# EAGLE board CCM_0009 (EAGLE 8.3.1)
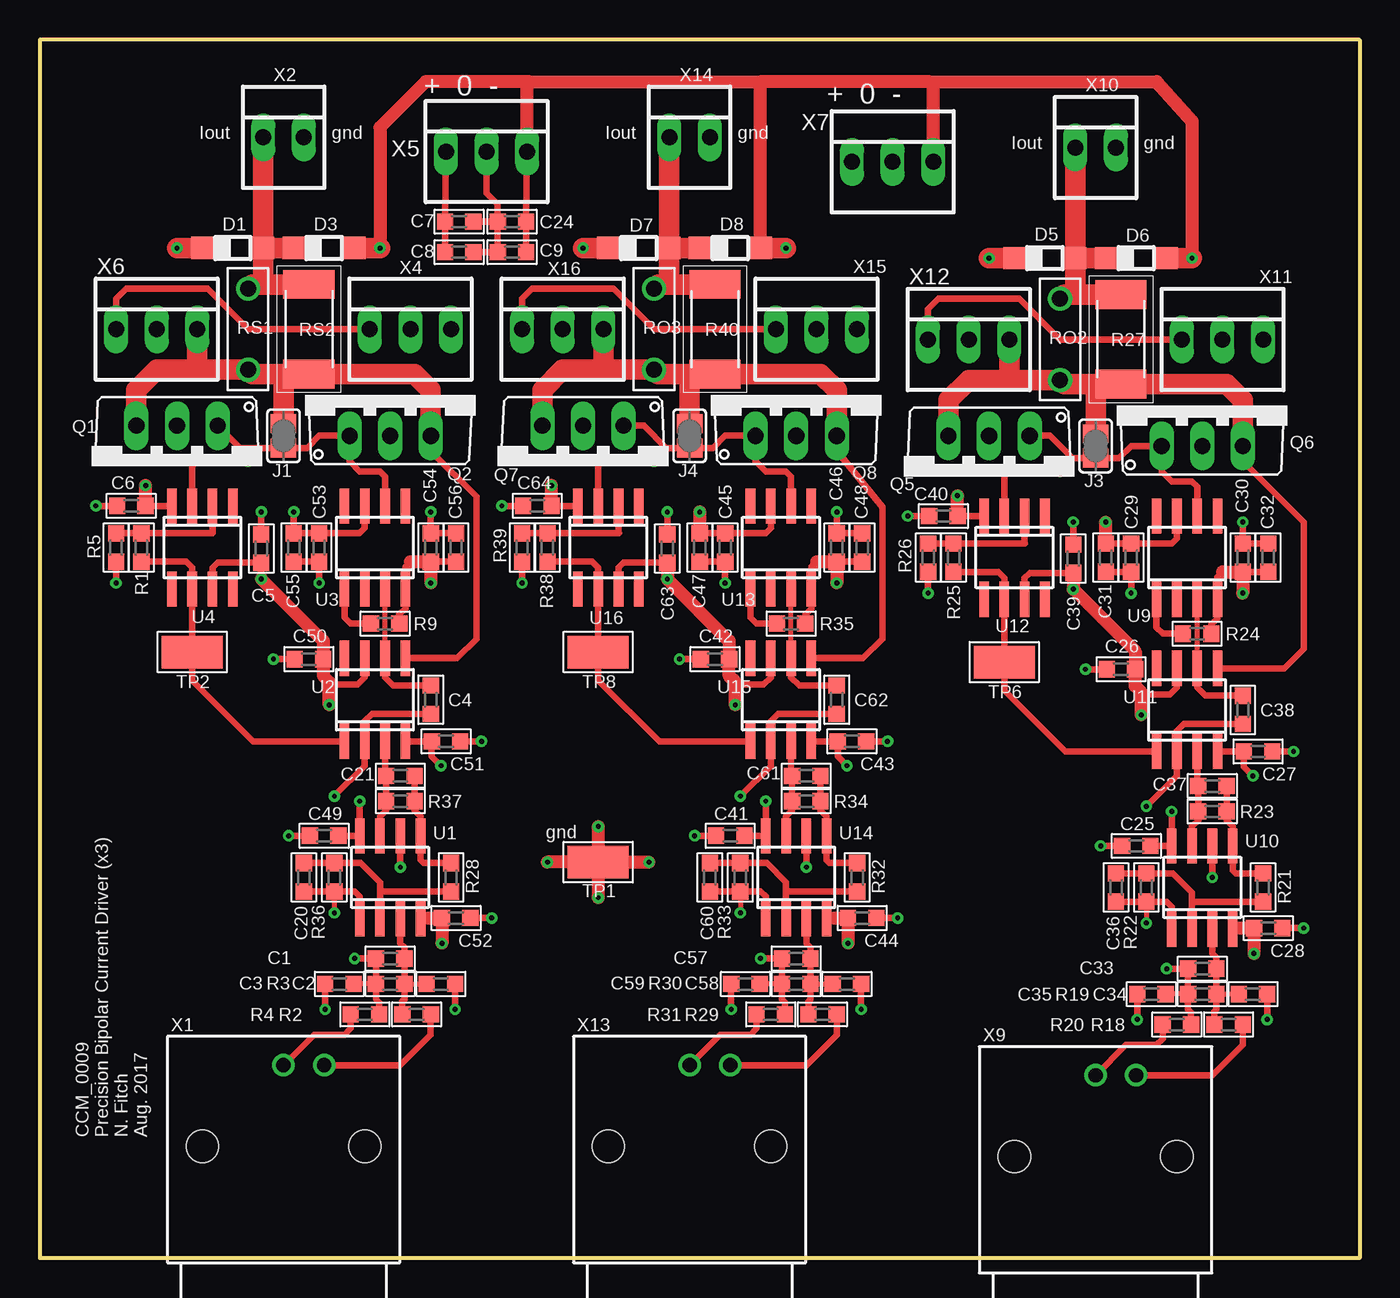
[diagram p0: board, top side]
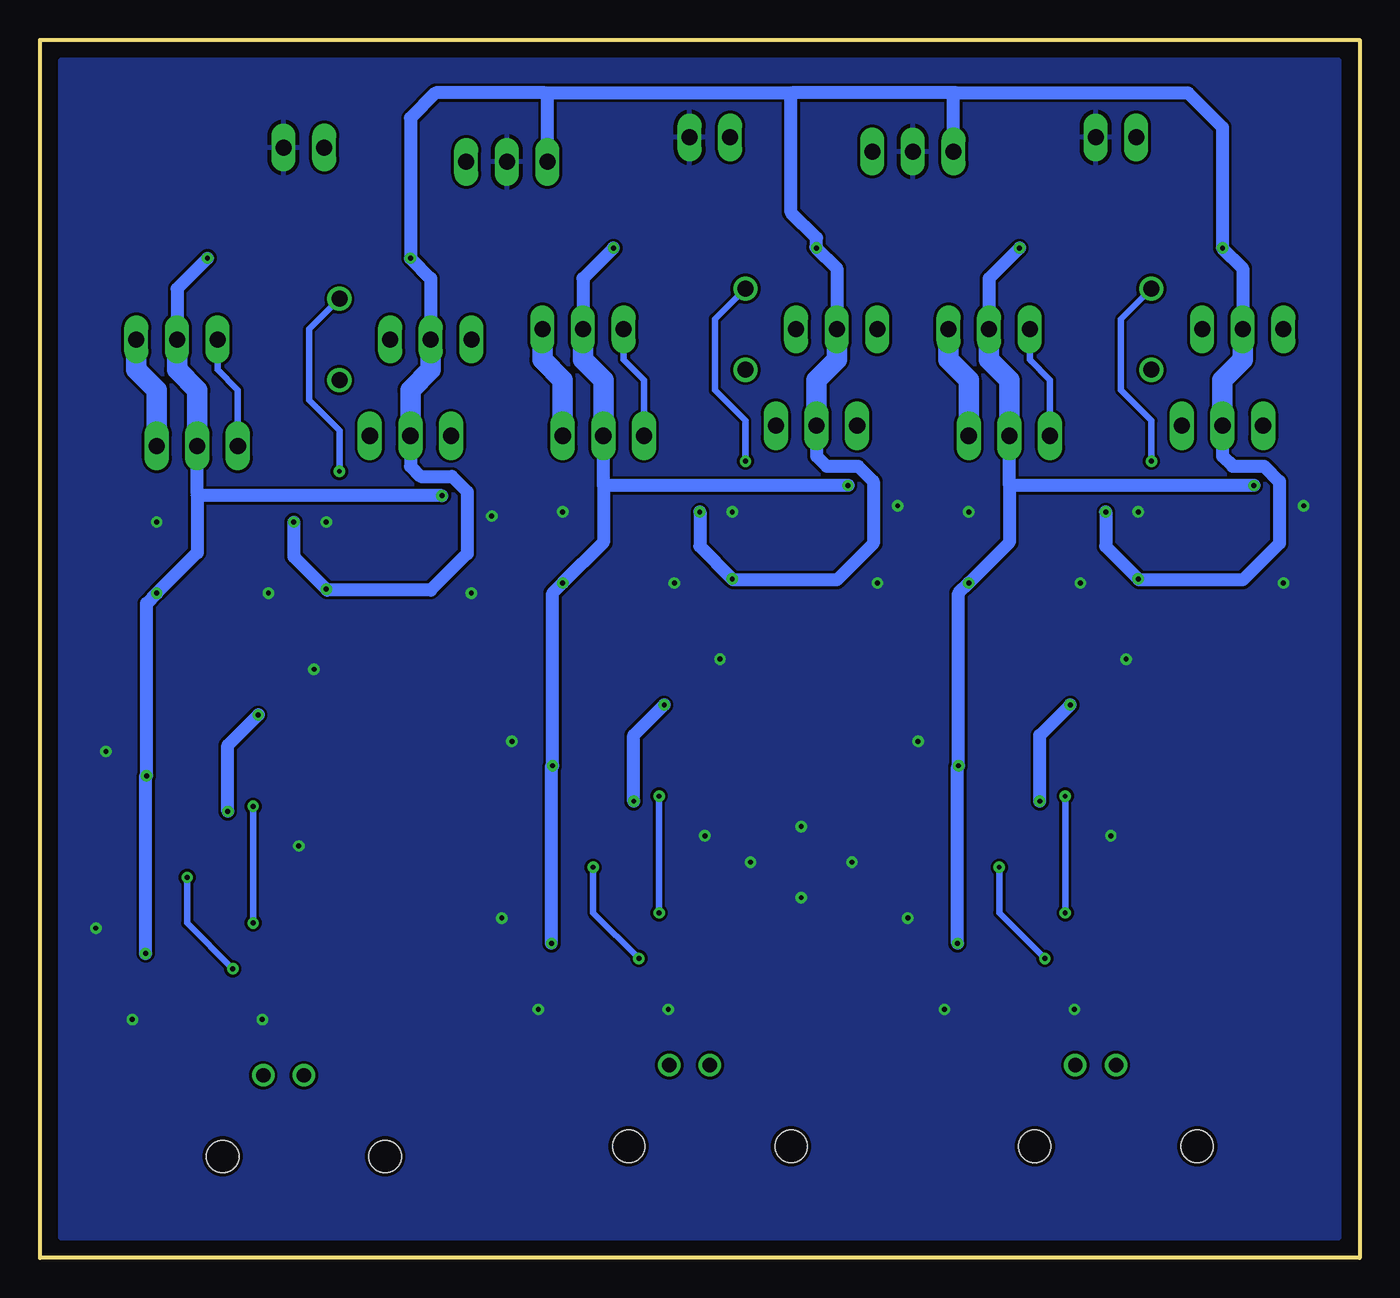
[diagram p1: board, bottom side, seen from below]

Size 82.55 x 76.2 mm. Coordinates in mm from the lower left corner, seen from the top.
Outline: 0,0 82.55,0 82.55,76.2 0,76.2 0,0
Copper layers (1*16): Top 0.035mm / dielectric 1.5mm / Bottom 0.035mm
Design rules "default *": minimum track width 10mil, minimum drill 10mil, track to track 7mil, track to pad 7mil, pad to pad 7mil, via to via 7mil, smd to smd 7mil, copper to edge 10mil, drill to drill 8mil, minimum pad ring 10mil, minimum via ring 8mil, stop-mask expansion 4mil, vias tented up to drill 0mil, thermal gap 10mil
Net classes: 1 standard: width 0.61 mm, clearance 0.254 mm

## Footprints (pad centres in the part's own frame; a part is rotated, then mirrored left to right if it is on the bottom)
0603 = smd 1.016 x 1.016: 1 -0.889,0; 2 0.889,0
SOD123 = smd 1.4 x 1.4: A 1.9,0; C -1.9,0
SJ = smd 1.168 x 1.6: 1 -0.762,0; 2 0.762,0
TO220AV = drill 1.016 long: B -2.54,-2.54; C 0,-2.54; E 2.54,-2.54
2512 = smd 1.8 x 3.2: 1 -2.8,0; 2 2.8,0
LTO30 = drill 1: P$1 0,0; P$2 5.08,0
TESTPOINT = smd 3.81 x 2.032: P$1 0,0
SO8 = smd 0.6 x 2.2: 1 -1.905,-2.6; 2 -0.635,-2.6; 3 0.635,-2.6; 4 1.905,-2.6; 5 1.905,2.6; 6 0.635,2.6; 7 -0.635,2.6; 8 -1.905,2.6
AMP_227161 = drill 0.9 pad 1.27: 1 0,-5.08; 2 -2.54,-5.08 | hole 2: -5.08,0; 5.08,0
22-23-2021 = drill 1 long: 1 -1.27,0; 2 1.27,0
22-23-2031 = drill 1 long: 1 -2.54,0; 2 0,0; 3 2.54,0

## Placement (x,y rotation side)
C1  10nF  [0603]  21.91,18.73 180 top
C2  1nF  [0603]  25.08,17.14 180 top
C3  1nF  [0603]  18.73,17.14 180 top
C4  DNI  [0603]  24.45,34.92 90 top
C5  0.1u  [0603]  13.84,44.39 90 top
C6  0.1u  [0603]  5.71,47.05 0 top
C7  4.7u  [0603]  26.23,64.83 0 top
C8  0.1u  [0603]  26.23,62.93 0 top
C9  4.7u  [0603]  29.53,62.93 0 top
C20  47pF  [0603]  16.51,23.81 270 top
C21  47pF  [0603]  22.54,30.16 180 top
C24  0.1u  [0603]  29.53,64.83 0 top
C25  0.1u  [0603]  68.58,25.78 180 top
C26  0.1u  [0603]  67.63,36.83 180 top
C27  0.1u  [0603]  76.2,31.69 180 top
C28  0.1u  [0603]  76.83,20.64 180 top
C29  0.1u  [0603]  68.26,43.81 270 top
C30  0.1u  [0603]  75.25,43.81 270 top
C31  4.7u  [0603]  66.67,43.81 270 top
C32  4.7u  [0603]  76.83,43.81 270 top
C33  10nF  [0603]  72.71,18.1 180 top
C34  1nF  [0603]  75.88,16.51 180 top
C35  1nF  [0603]  69.53,16.51 180 top
C36  47pF  [0603]  67.31,23.18 270 top
C37  47pF  [0603]  73.34,29.53 180 top
C38  DNI  [0603]  75.25,34.29 90 top
C39  0.1u  [0603]  64.64,43.75 90 top
C40  0.1u  [0603]  56.52,46.42 0 top
C41  0.1u  [0603]  43.18,26.42 180 top
C42  0.1u  [0603]  42.23,37.47 180 top
C43  0.1u  [0603]  50.8,32.32 180 top
C44  0.1u  [0603]  51.44,21.27 180 top
C45  0.1u  [0603]  42.86,44.45 270 top
C46  0.1u  [0603]  49.85,44.45 270 top
C47  4.7u  [0603]  41.27,44.45 270 top
C48  4.7u  [0603]  51.44,44.45 270 top
C49  0.1u  [0603]  17.78,26.42 180 top
C50  0.1u  [0603]  16.83,37.47 180 top
C51  0.1u  [0603]  25.4,32.32 180 top
C52  0.1u  [0603]  26.04,21.27 180 top
C53  0.1u  [0603]  17.46,44.45 270 top
C54  0.1u  [0603]  24.45,44.45 270 top
C55  4.7u  [0603]  15.88,44.45 270 top
C56  4.7u  [0603]  26.04,44.45 270 top
C57  10nF  [0603]  47.31,18.73 180 top
C58  1nF  [0603]  50.48,17.14 180 top
C59  1nF  [0603]  44.13,17.14 180 top
C60  47pF  [0603]  41.91,23.81 270 top
C61  47pF  [0603]  47.94,30.16 180 top
C62  DNI  [0603]  49.85,34.92 90 top
C63  0.1u  [0603]  39.24,44.39 90 top
C64  0.1u  [0603]  31.11,47.05 0 top
D1  BAV19W  [SOD123]  12.06,63.18 0 top
D3  BAV19W  [SOD123]  17.78,63.18 0 top
D5  BAV19W  [SOD123]  62.87,62.55 0 top
D6  BAV19W  [SOD123]  68.58,62.55 0 top
D7  BAV19W  [SOD123]  37.47,63.18 0 top
D8  BAV19W  [SOD123]  43.18,63.18 0 top
J1  [SJ]  15.24,51.44 90 top
J3  [SJ]  66.04,50.8 90 top
J4  [SJ]  40.64,51.44 90 top
Q1  TIP29  [TO220AV]  8.57,49.53 180 top
Q2  TIP30  [TO220AV]  21.91,53.98 0 top
Q5  TIP29  [TO220AV]  59.37,48.9 180 top
Q6  TIP30  [TO220AV]  72.71,53.34 0 top
Q7  TIP29  [TO220AV]  33.97,49.53 180 top
Q8  TIP30  [TO220AV]  47.31,53.98 0 top
R1  9.000k  [0603]  6.35,44.45 270 top
R2  1.000k  [0603]  23.56,15.24 180 top
R3  1M  [0603]  21.91,17.14 180 top
R4  1.000k  [0603]  20.32,15.24 0 top
R5  1.000k  [0603]  4.76,44.45 270 top
R9  DNI  [0603]  21.59,39.69 0 top
R18  1.000k  [0603]  74.36,14.61 180 top
R19  1M  [0603]  72.71,16.51 180 top
R20  1.000k  [0603]  71.12,14.61 0 top
R21  DNI  [0603]  76.52,23.18 270 top
R22  1.000k  [0603]  69.22,23.18 90 top
R23  1.000k  [0603]  73.34,27.94 0 top
R24  DNI  [0603]  72.39,39.05 0 top
R25  10.00k  [0603]  57.15,43.81 270 top
R26  1.000k  [0603]  55.56,43.81 270 top
R27  DNI  [2512]  67.63,57.47 90 top
R28  DNI  [0603]  25.72,23.81 270 top
R29  1.000k  [0603]  48.96,15.24 180 top
R30  1M  [0603]  47.31,17.14 180 top
R31  1.000k  [0603]  45.72,15.24 0 top
R32  DNI  [0603]  51.12,23.81 270 top
R33  1.000k  [0603]  43.81,23.81 90 top
R34  1.000k  [0603]  47.94,28.57 0 top
R35  DNI  [0603]  46.99,39.69 0 top
R36  1.000k  [0603]  18.41,23.81 90 top
R37  1.000k  [0603]  22.54,28.57 0 top
R38  10.00k  [0603]  31.75,44.45 270 top
R39  1.000k  [0603]  30.16,44.45 270 top
R40  DNI  [2512]  42.23,58.1 90 top
RO2  1.00  [LTO30]  63.82,54.93 90 top
RO3  1.00  [LTO30]  38.42,55.56 90 top
RS1  1.00  [LTO30]  13.02,55.56 90 top
RS2  DNI  [2512]  16.83,58.1 90 top
TP1  TESTPOINT  [TESTPOINT]  34.92,24.77 0 top
TP2  TESTPOINT  [TESTPOINT]  9.53,37.91 0 top
TP6  TESTPOINT  [TESTPOINT]  60.33,37.27 0 top
TP8  TESTPOINT  [TESTPOINT]  34.92,37.91 0 top
U1  ADA4898-2  [SO8]  21.91,23.81 0 top
U2  AD8276  [SO8]  20.95,34.92 0 top
U3  BUF634  [SO8]  20.95,44.45 0 top
U4  AD4898-1  [SO8]  10.16,44.45 180 top
U9  BUF634  [SO8]  71.75,43.81 0 top
U10  ADA4898-2  [SO8]  72.71,23.18 0 top
U11  AD8276  [SO8]  71.75,34.29 0 top
U12  AD4898-1  [SO8]  60.96,43.81 180 top
U13  BUF634  [SO8]  46.35,44.45 0 top
U14  ADA4898-2  [SO8]  47.31,23.81 0 top
U15  AD8276  [SO8]  46.35,34.92 0 top
U16  AD4898-1  [SO8]  35.56,44.45 180 top
X1  1-227161-0  [AMP_227161]  15.24,6.99 180 top
X2  22-23-2021  [22-23-2021]  15.24,70.1 0 top
X4  22-23-2031  [22-23-2031]  23.18,58.1 0 top
X5  22-23-2031  [22-23-2031]  27.94,69.22 0 top
X6  22-23-2031  [22-23-2031]  7.3,58.1 0 top
X7  22-23-2031  [22-23-2031]  53.34,68.58 0 top
X9  1-227161-0  [AMP_227161]  66.04,6.35 180 top
X10  22-23-2021  [22-23-2021]  66.04,69.47 0 top
X11  22-23-2031  [22-23-2031]  73.98,57.47 0 top
X12  22-23-2031  [22-23-2031]  58.1,57.47 0 top
X13  1-227161-0  [AMP_227161]  40.64,6.99 180 top
X14  22-23-2021  [22-23-2021]  40.64,70.1 0 top
X15  22-23-2031  [22-23-2031]  48.58,58.1 0 top
X16  22-23-2031  [22-23-2031]  32.7,58.1 0 top

## Library data of the parts
C1-C9 C20 C21 C24-C64 J1 J3 J4 R1-R5 R9 R18-R26 R28-R39 = acrooptics
D1 D3 D5-D8 = AquariumLibrary
Q1 Q2 Q5-Q8 = transistor-power
R27 R40 RO2 RO3 RS1 RS2 U2 U3 U9 U11 U13 U15 = noah
TP1 TP2 TP6 TP8 = Fitch
U1 U10 U14 = noah; MF: ALTERA CORPORATION; MPN: AD8542ARZ-REEL; OC_FARNELL: 1424150; OC_NEWARK: 59K6827
U4 U12 U16 = noah; MF: ANALOG DEVICES; MPN: AD744JR; OC_FARNELL: 1651300; OC_NEWARK: 05F7341
X1 X9 X13 = con-coax; MF: TYCO ELECTRONICS; MPN: 1-227161; OC_FARNELL: unknown; OC_NEWARK: 33B3200
X2 X10 X14 = con-molex; MF: MOLEX; MPN: 22-23-2021; OC_FARNELL: 1462926; OC_NEWARK: 25C3832
X4-X7 X11 X12 X15 X16 = con-molex; MF: MOLEX; MPN: 22-23-2031; OC_FARNELL: 1462950; OC_NEWARK: 30C0862

## Nets
GND: C2.1 C3.2 C5.2 C6.1 C7.2 C8.2 C9.1 C24.1 C25.2 C26.2 C27.1 C28.1 C29.2 C30.1 C31.2 C32.1 C34.1 C35.2 C39.2 C40.1 C41.2 C42.2 C43.1 C44.1 C45.2 C46.1 C47.2 C48.1 C49.2 C50.2 C51.1 C52.1 C53.2 C54.1 C55.2 C56.1 C58.1 C59.2 C63.2 C64.1 R5.2 R26.2 R39.2 TP1.P$1 X2.2 X5.2 X7.2 X10.2 X14.2
N$1: R2.1 X1.2
N$2: R4.1 X1.1
N$3: C4.2 U2.6 U3.3
N$5: C1.1 C2.2 R2.2 R3.1 U1.3
N$6: C1.2 C3.1 R3.2 R4.2 U1.6
N$7: R1.1 R5.1 U4.2
N$9: J1.1 Q1.B Q2.B U3.6 X4.1 X6.1
N$11: D1.A D3.C RS1.P$2 RS2.2 U4.3 X2.1
N$12: J1.2 Q1.E Q2.E RS1.P$1 RS2.1 U2.5 X4.3 X6.3
N$14: R9.1 U3.1
N$15: R1.2 TP2.P$1 U2.1 U4.6
N$26: C20.1 R28.2 R36.2 U1.2
N$28: C33.1 C34.2 R18.2 R19.1 U10.3
N$29: C33.2 C35.1 R19.2 R20.2 U10.6
N$30: R18.1 X9.2
N$31: C21.1 R28.1 R37.2 U1.5
N$32: R20.1 X9.1
N$33: C21.2 R37.1 U1.7 U2.3
N$34: C36.1 R21.2 R22.2 U10.2
N$35: C4.1 C20.2 R36.1 U1.1 U2.2
N$36: C37.1 R21.1 R23.2 U10.5
N$37: C37.2 R23.1 U10.7 U11.3
N$38: C36.2 C38.1 R22.1 U10.1 U11.2
N$39: J3.1 Q5.B Q6.B U9.6 X11.1 X12.1
N$40: D5.A D6.C R27.2 RO2.P$2 U12.3 X10.1
N$41: R24.1 U9.1
N$42: C38.2 U9.3 U11.6
N$43: R25.2 TP6.P$1 U11.1 U12.6
N$44: J3.2 Q5.E Q6.E R27.1 RO2.P$1 U11.5 X11.3 X12.3
N$45: R25.1 R26.1 U12.2
N$46: C57.1 C58.2 R29.2 R30.1 U14.3
N$47: C57.2 C59.1 R30.2 R31.2 U14.6
N$48: R29.1 X13.2
N$49: R31.1 X13.1
N$50: C60.1 R32.2 R33.2 U14.2
N$51: C61.1 R32.1 R34.2 U14.5
N$52: C61.2 R34.1 U14.7 U15.3
N$53: C60.2 C62.1 R33.1 U14.1 U15.2
N$54: J4.1 Q7.B Q8.B U13.6 X15.1 X16.1
N$55: D7.A D8.C R40.2 RO3.P$2 U16.3 X14.1
N$56: R35.1 U13.1
N$57: C62.2 U13.3 U15.6
N$58: R38.2 TP8.P$1 U15.1 U16.6
N$59: J4.2 Q7.E Q8.E R40.1 RO3.P$1 U15.5 X15.3 X16.3
N$60: R38.1 R39.1 U16.2
V+: C5.1 C7.1 C8.1 C25.1 C26.1 C29.1 C31.1 C39.1 C41.1 C42.1 C45.1 C47.1 C49.1 C50.1 C53.1 C55.1 C63.1 D1.C D5.C D7.C Q1.C Q5.C Q7.C U1.8 U2.7 U3.7 U4.7 U9.7 U10.8 U11.7 U12.7 U13.7 U14.8 U15.7 U16.7 X5.1 X6.2 X7.1 X12.2 X16.2
V-: C6.2 C9.2 C24.2 C27.2 C28.2 C30.2 C32.2 C40.2 C43.2 C44.2 C46.2 C48.2 C51.2 C52.2 C54.2 C56.2 C64.2 D3.A D6.A D8.A Q2.C Q6.C Q8.C R9.2 R24.2 R35.2 U1.4 U2.4 U3.4 U4.4 U9.4 U10.4 U11.4 U12.4 U13.4 U14.4 U15.4 U16.4 X4.2 X5.3 X7.3 X11.2 X15.2

## Tracks (layer width: path | path; a pad name or v marks a point on that pad's centre or on a via)
GND  (via drill 0.3)
  Top 0.406: C3.2 v17.84,15.56 | C2.1 v25.97,15.56 | C51.1 v27.62,32.32 | C55.2 C53.2 v17.46,42.23 | C56.1 C54.1 v24.45,46.67 | v15.56,26.42 C49.2 | v4.76,42.23 R5.2 | C6.1 v3.49,47.05 | C5.2 v13.84,46.67 | C50.2 v14.61,37.47 | C52.1 v28.26,21.27 | C59.2 v43.24,15.56 | C58.1 v51.37,15.56 | C43.1 v53.02,32.32 | C47.2 C45.2 v42.86,42.23 | C48.1 C46.1 v49.85,46.67 | v40.96,26.42 C41.2 | v30.16,42.23 R39.2 | C64.1 v28.89,47.05 | C63.2 v39.24,46.67 | C42.2 v40.01,37.47 | C44.1 v53.66,21.27 | C35.2 v68.64,14.92 | C34.1 v76.77,14.92 | C27.1 v78.42,31.69 | C31.2 C29.2 v68.26,41.59 | C32.1 C30.1 v75.25,46.04 | v66.36,25.78 C25.2 | v55.56,41.59 R26.2 | C40.1 v54.29,46.42 | C39.2 v64.64,46.04 | C26.2 v65.41,36.83 | C28.1 v79.06,20.64 | C8.2 C9.1 C24.1 | C24.1 C7.2 | X5.2 27.94,66.61 28.64,65.91 C24.1
  Top 0.813: v34.92,26.99 TP1.P$1 | TP1.P$1 v31.75,24.77 | TP1.P$1 v38.1,24.77 | TP1.P$1 v34.92,22.54
  pour Bottom: 1.27,1.27 1.27,74.93 81.28,74.93 81.28,1.27
N$1
  Top 0.406: X1.2 22.54,12.06 24.45,13.97 R2.1
N$2
  Top 0.406: R4.1 19.43,14.35 19.05,13.97 17.14,13.97 X1.1
N$3
  Top 0.305: U2.6 U3.3
  Top 0.406: C4.2 22.1,35.81 21.59,36.32 U2.6
N$5
  Top 0.305: R3.1 C2.2
  Top 0.406: U1.3 22.54,19.68 22.8,19.43 C1.1 R3.1 22.8,16.19 22.67,16.07 R2.2
N$6  (via drill 0.3)
  Top 0.305: R3.2 C3.1
  Top 0.406: U1.6 v22.54,24.45 | v19.68,18.73 C1.2 R3.2 21.02,16.19 21.21,16 R4.2
  Bottom 0.406: v22.54,24.45 22.54,21.59 v19.68,18.73
N$7
  Top 0.406: U4.2 10.79,45.36 10.81,45.34 R1.1 R5.1
N$9
  Top 0.406: 19.24,51.44 17.46,51.44 16.7,50.67 J1.1 12.51,50.67 Q1.B | 19.24,51.44 Q2.B | X6.1 4.76,60.01 5.4,60.64 10.48,60.64 13.02,58.1 X4.1 | U3.6 21.59,48.9 21.27,49.21 20,49.21 19.37,49.85 19.37,51.31 19.24,51.44
  Bottom 0.406: X4.1 20.64,56.2 19.37,54.93 Q2.B
N$11  (via drill 0.3)
  Top 0.406: U4.3 9.53,49.53 9.84,49.85 v13.02,49.85
  Top 1.27: 13.96,60.9 RS2.2 | 13.96,60.9 13.28,60.9 RS1.P$2 | D3.C D1.A | D1.A 13.96,60.9 | 13.96,60.9 | D1.A X2.1
  Bottom 0.406: v13.02,49.85 13.02,52.39 14.92,54.29 14.92,58.74 RS1.P$2
N$12
  Top 0.406: Q2.E 24.45,50.48 27.3,47.62 27.3,38.73 26.1,37.53 22.87,37.53 U2.5
  Top 1.27: 15.05,55.3 RS2.1 23.44,55.3 24.45,54.29 Q2.E | 15.05,55.3 13.28,55.3 RS1.P$1 9.82,55.56 | J1.2 15.24,55.12 15.05,55.3 | 9.82,55.56 7.3,55.56 6.03,54.29 Q1.E | X6.3 9.84,55.59 9.82,55.56
  Bottom 1.27: X4.3 25.72,56.2 24.45,54.93 Q2.E
N$14
  Top 0.406: U3.1 19.05,40.07 19.43,39.69 R9.1
N$15
  Top 0.406: R1.2 9.14,43.56 9.53,43.18 U4.6 TP2.P$1 9.53,36.13 13.35,32.31 U2.1
N$26
  Top 0.305: 21.4,22.92 21.27,22.8
  Top 0.406: R28.2 21.4,22.92 | U1.2 21.27,22.8 21.27,23.5 20.07,24.7 R36.2 C20.1
N$28
  Top 0.305: R19.1 C34.2
  Top 0.406: U10.3 73.34,19.05 73.6,18.8 C33.1 R19.1 73.6,15.56 73.47,15.43 R18.2
N$29  (via drill 0.3)
  Top 0.305: R19.2 C35.1
  Top 0.406: U10.6 v73.34,23.81 | v70.48,18.1 C33.2 R19.2 71.82,15.56 72.01,15.37 R20.2
  Bottom 0.406: v73.34,23.81 73.34,20.95 v70.48,18.1
N$30
  Top 0.406: X9.2 73.34,11.43 75.25,13.34 R18.1
N$31
  Top 0.406: C21.1 R37.2 23.43,28 23.81,27.62 U1.5 23.81,24.89 24,24.7 R28.1
N$32
  Top 0.406: R20.1 70.23,13.72 69.85,13.34 67.94,13.34 X9.1
N$33
  Top 0.406: U1.7 21.27,27.62 21.65,28 R37.1 C21.2 21.59,30.23 U2.3
N$34
  Top 0.305: 72.2,22.29 72.07,22.16
  Top 0.406: R21.2 72.2,22.29 | U10.2 72.07,22.16 72.07,22.86 70.87,24.07 R22.2 C36.1
N$35  (via drill 0.3)
  Top 0.305: R36.1 v18.41,21.59
  Top 0.406: C20.2 R36.1 19.68,22.92 20,22.61 U1.1 | C4.1 20.77,34.04 20.32,33.59 U2.2 20.32,30.8 v18.41,28.89
  Bottom 0.406: v18.41,21.59 v18.41,28.89
N$36
  Top 0.406: C37.1 R23.2 74.23,27.37 74.61,26.99 U10.5 74.61,24.26 74.8,24.07 R21.1
N$37
  Top 0.406: U10.7 72.07,26.99 72.45,27.37 R23.1 C37.2 72.39,29.59 U11.3
N$38  (via drill 0.3)
  Top 0.305: R22.1 v69.22,20.95
  Top 0.406: C36.2 R22.1 70.48,22.29 70.8,21.97 U10.1 | C38.1 71.56,33.4 71.12,32.96 U11.2 71.12,30.16 v69.22,28.26
  Bottom 0.406: v69.22,20.95 v69.22,28.26
N$39
  Top 0.406: 70.04,50.8 68.26,50.8 67.5,50.04 J3.1 64.58,50.04 63.18,51.44 Q5.B | 70.04,50.8 Q6.B | X12.1 55.56,59.37 56.2,60.01 61.28,60.01 63.82,57.47 X11.1 | U9.6 72.39,48.26 72.07,48.58 70.8,48.58 70.17,49.21 70.17,50.68 70.04,50.8
  Bottom 0.406: X11.1 71.44,55.56 70.17,54.29 Q6.B
N$40  (via drill 0.3)
  Top 0.406: U12.3 60.33,48.9 60.64,49.21 v63.82,49.21
  Top 1.27: 64.77,60.27 R27.2 | 64.77,60.27 64.08,60.27 RO2.P$2 | D6.C D5.A | D5.A 64.77,60.27 | D5.A X10.1
  Bottom 0.406: v63.82,49.21 63.82,51.75 65.72,53.66 65.72,58.1 RO2.P$2
N$41
  Top 0.406: U9.1 69.85,39.43 70.23,39.05 R24.1
N$42
  Top 0.305: U11.6 U9.3
  Top 0.406: C38.2 72.9,35.18 72.39,35.69 U11.6
N$43
  Top 0.406: R25.2 59.94,42.93 60.33,42.55 U12.6 TP6.P$1 60.33,35.5 64.15,31.67 U11.1
N$44
  Top 0.406: Q6.E 75.25,49.85 79.06,46.04 79.06,38.1 77.85,36.89 73.67,36.89 U11.5
  Top 1.27: 65.85,54.67 R27.1 74.24,54.67 75.25,53.66 Q6.E | 65.85,54.67 64.08,54.67 RO2.P$1 60.62,54.93 | J3.2 66.04,54.48 65.85,54.67 | 60.62,54.93 58.1,54.93 56.83,53.66 Q5.E | X12.3 60.64,54.95 60.62,54.93
  Bottom 1.27: X11.3 76.52,55.56 75.25,54.29 Q6.E
N$45
  Top 0.406: U12.2 61.59,44.72 61.61,44.7 R25.1 R26.1
N$46
  Top 0.305: R30.1 C58.2
  Top 0.406: U14.3 47.94,19.68 48.2,19.43 C57.1 R30.1 48.2,16.19 48.07,16.07 R29.2
N$47  (via drill 0.3)
  Top 0.305: R30.2 C59.1
  Top 0.406: U14.6 v47.94,24.45 | v45.09,18.73 C57.2 R30.2 46.42,16.19 46.61,16 R31.2
  Bottom 0.406: v47.94,24.45 47.94,21.59 v45.09,18.73
N$48
  Top 0.406: X13.2 47.94,12.06 49.85,13.97 R29.1
N$49
  Top 0.406: R31.1 44.83,14.35 44.45,13.97 42.55,13.97 X13.1
N$50
  Top 0.305: 46.8,22.92 46.67,22.8
  Top 0.406: R32.2 46.8,22.92 | U14.2 46.67,22.8 46.67,23.5 45.47,24.7 R33.2 C60.1
N$51
  Top 0.406: C61.1 R34.2 48.83,28 49.21,27.62 U14.5 49.21,24.89 49.4,24.7 R32.1
N$52
  Top 0.406: U14.7 46.67,27.62 47.05,28 R34.1 C61.2 46.99,30.23 U15.3
N$53  (via drill 0.3)
  Top 0.305: R33.1 v43.81,21.59
  Top 0.406: C60.2 R33.1 45.09,22.92 45.4,22.61 U14.1 | C62.1 46.16,34.04 45.72,33.59 U15.2 45.72,30.8 v43.81,28.89
  Bottom 0.406: v43.81,21.59 v43.81,28.89
N$54
  Top 0.406: 44.64,51.44 42.86,51.44 42.1,50.67 J4.1 39.18,50.67 37.78,52.07 Q7.B | 44.64,51.44 Q8.B | X16.1 30.16,60.01 30.8,60.64 35.88,60.64 38.42,58.1 X15.1 | U13.6 46.99,48.9 46.67,49.21 45.4,49.21 44.77,49.85 44.77,51.31 44.64,51.44
  Bottom 0.406: X15.1 46.04,56.2 44.77,54.93 Q8.B
N$55  (via drill 0.3)
  Top 0.406: U16.3 34.92,49.53 35.24,49.85 v38.42,49.85
  Top 1.27: 39.37,60.9 R40.2 | 39.37,60.9 38.68,60.9 RO3.P$2 | D8.C D7.A | D7.A 39.37,60.9 | 39.37,60.9 | D7.A X14.1
  Bottom 0.406: v38.42,49.85 38.42,52.39 40.32,54.29 40.32,58.74 RO3.P$2
N$56
  Top 0.406: U13.1 44.45,40.07 44.83,39.69 R35.1
N$57
  Top 0.305: U15.6 U13.3
  Top 0.406: C62.2 47.5,35.81 46.99,36.32 U15.6
N$58
  Top 0.406: R38.2 34.54,43.56 34.92,43.18 U16.6 TP8.P$1 34.92,36.13 38.75,32.31 U15.1
N$59
  Top 0.406: Q8.E 49.85,50.48 52.7,46.99 52.7,38.73 51.5,37.53 48.27,37.53 U15.5
  Top 1.27: 40.45,55.3 R40.1 48.84,55.3 49.85,54.29 Q8.E | 40.45,55.3 38.68,55.3 RO3.P$1 35.22,55.56 | J4.2 40.64,55.12 40.45,55.3 | 35.22,55.56 32.7,55.56 31.43,54.29 Q7.E | X16.3 35.24,55.59 35.22,55.56
  Bottom 1.27: X15.3 51.12,56.2 49.85,54.93 Q8.E
N$60
  Top 0.406: U16.2 36.2,45.36 36.21,45.34 R38.1 R39.1
V+  (via drill 0.3)
  Top 0.406: C49.1 U1.8 v20,28.57 | 17.72,36.41 17.72,36.26 18.1,35.88 19.88,35.88 20.32,36.32 U2.7 | U3.7 20.32,45.66 20,45.34 C53.1 C55.1 v15.88,46.67 | U4.7 10.79,43.18 11.11,43.5 C5.1 v13.84,42.48 | 43.12,36.41 43.12,36.26 43.5,35.88 45.28,35.88 45.72,36.32 U15.7 | C47.1 C45.1 45.4,45.34 45.72,45.66 U13.7 | C63.1 36.51,43.5 36.2,43.18 U16.7 | C41.1 U14.8 v45.4,28.57 | 68.52,35.77 68.52,35.62 68.9,35.24 70.67,35.24 71.12,35.69 U11.7 | C31.1 C29.1 70.8,44.7 71.12,45.02 U9.7 | C39.1 61.91,42.86 61.59,42.55 U12.7 | C25.1 U10.8 v70.8,27.94 | X5.1 C7.1 C8.1
  Top 0.813: v13.84,42.48 17.72,38.61 C50.1 17.72,36.41 18.1,36.03 v18.1,34.61 | C63.1 v39.24,42.48 43.12,38.61 C42.1 43.12,36.41 43.5,36.03 v43.5,34.61 | C47.1 v41.27,46.67 | C39.1 v64.64,41.85 68.52,37.97 C26.1 68.52,35.77 68.9,35.39 v68.9,33.97 | C31.1 v66.67,46.04
  Top 1.27: D1.C v8.57,63.18 | D7.C v33.97,63.18 | D5.C v59.37,62.55
  Bottom 0.813: X6.2 7.3,61.91 v8.57,63.18 8.57,70.74 10.73,72.9 25.22,72.9 | v15.88,46.67 15.88,44.51 v13.84,42.48 13.78,42.42 7.3,42.42 5.02,44.7 5.02,48.58 5.97,49.53 7.94,49.53 8.57,50.16 Q1.C | v20,28.57 20,32.7 v18.1,34.61 | v33.97,63.18 32.7,61.91 X16.2 | v41.27,46.67 41.27,44.51 v39.24,42.48 39.18,42.42 32.7,42.42 30.42,44.7 30.42,48.58 31.37,49.53 33.34,49.53 33.97,50.16 Q7.C | v45.4,28.57 45.4,32.7 v43.5,34.61 | X12.2 58.1,61.28 v59.37,62.55 59.37,71.31 57.78,72.9 50.96,72.9 | v66.67,46.04 66.67,43.88 v64.64,41.85 64.58,41.78 58.1,41.78 55.82,44.07 55.82,47.94 56.77,48.9 58.74,48.9 59.37,49.53 Q5.C | v70.8,27.94 70.8,32.07 v68.9,33.97 | 34.04,63.25 v33.97,63.18 | 50.96,72.9 35.5,72.9 | v33.97,63.18 33.97,63.82 35.56,65.41 35.56,72.84 35.5,72.9 | 25.22,72.9 35.5,72.9 | X5.1 25.4,72.72 25.22,72.9 | X7.1 50.8,72.73 50.96,72.9
  Bottom 1.27: X6.2 7.3,56.2 8.57,54.93 Q1.C | X16.2 32.7,56.2 33.97,54.93 Q7.C | X12.2 58.1,55.56 59.37,54.29 Q5.C
V-  (via drill 0.3)
  Top 0.305: 24.5,32.31 C51.2 | 49.9,32.31 C43.2 | 75.3,31.67 C27.2
  Top 0.406: U2.4 24.5,32.31 | C54.2 C56.2 | R9.2 22.48,40.26 22.86,40.64 U3.4 22.86,43.24 23.18,43.56 | 24.26,21.27 23.87,21.27 U1.4 | C6.2 U4.4 | C51.2 24.51,31.37 v25.08,30.8 | U15.4 49.9,32.31 | C46.2 C48.2 | R35.2 47.88,40.26 48.26,40.64 U13.4 48.26,43.24 48.58,43.56 | 49.66,21.27 49.27,21.27 U14.4 | C64.2 U16.4 | C43.2 49.91,31.37 v50.48,30.8 | U11.4 75.3,31.67 | C30.2 C32.2 | R24.2 73.28,39.62 73.66,40.01 U9.4 73.66,42.61 73.98,42.93 | 75.06,20.64 74.67,20.64 U10.4 | C40.2 U12.4 | C27.2 75.31,30.73 v75.88,30.16 | X5.3 C24.2 C9.2
  Top 0.813: 23.18,43.56 C54.2 v24.45,42.23 | C6.2 v6.6,48.32 | 24.26,21.27 C52.2 v25.15,19.68 | 48.58,43.56 C46.2 v49.85,42.23 | C64.2 v32,48.32 | 49.66,21.27 C44.2 v50.55,19.68 | 73.98,42.93 C30.2 v75.25,41.59 | C40.2 v57.4,47.69 | 75.06,20.64 C28.2 v75.95,19.05 | v21.27,63.18 21.27,70.74 24.13,73.6 30.58,73.6 | D8.A 45.09,73.55 45.14,73.6 | v72.07,62.55 72.07,71.12 69.85,73.6 55.6,73.6 | 55.6,73.6 45.14,73.6 | 55.6,73.6 55.88,73.44 X7.3 | 30.58,73.6 45.14,73.6 | X5.3 30.48,73.5 30.58,73.6
  Top 1.27: D3.A v21.27,63.18 | D8.A v46.67,63.18 | v72.07,62.55 D6.A
  Bottom 0.813: 21.91,48.46 21.91,44.77 v24.45,42.23 25.08,41.59 v25.08,30.8 25.15,30.73 v25.15,19.68 | 21.91,48.46 Q2.C | v21.27,63.18 23.18,61.28 X4.2 | v6.6,48.32 21.89,48.32 21.91,48.46 | 47.31,48.46 47.31,44.77 v49.85,42.23 50.48,41.59 v50.48,30.8 50.55,30.73 v50.55,19.68 | 47.31,48.46 Q8.C | v46.67,63.18 48.58,61.28 X15.2 | v32,48.32 47.3,48.32 47.31,48.46 | 72.71,47.83 72.71,44.13 v75.25,41.59 75.88,40.96 v75.88,30.16 75.95,30.1 v75.95,19.05 | 72.71,47.83 Q6.C | v72.07,62.55 73.98,60.64 X11.2 | v57.4,47.69 72.69,47.69 72.71,47.83
  Bottom 1.27: Q2.C 21.91,54.93 23.18,56.2 X4.2 | Q8.C 47.31,54.93 48.58,56.2 X15.2 | Q6.C 72.71,54.29 73.98,55.56 X11.2

## Text on the board
tPlace: + 0 - | + 0 - | Iout | gnd | Iout | gnd | Iout | gnd | gnd | CCM_0009 / Precision Bipolar Current Driver (x3) / N. Fitch / Aug. 2017